# Altium PCB Paw_Back.PcbDoc
Units mm, origin at the board's own origin, x right, y up, seen from the top; angles counter-clockwise.
Board outline 50 x 50 mm, 2 copper layers (Top Layer, Bottom Layer); 42 components, 68 nets, 205 pads, 0 vias.
Unrouted connection lines stored in the file: 128.
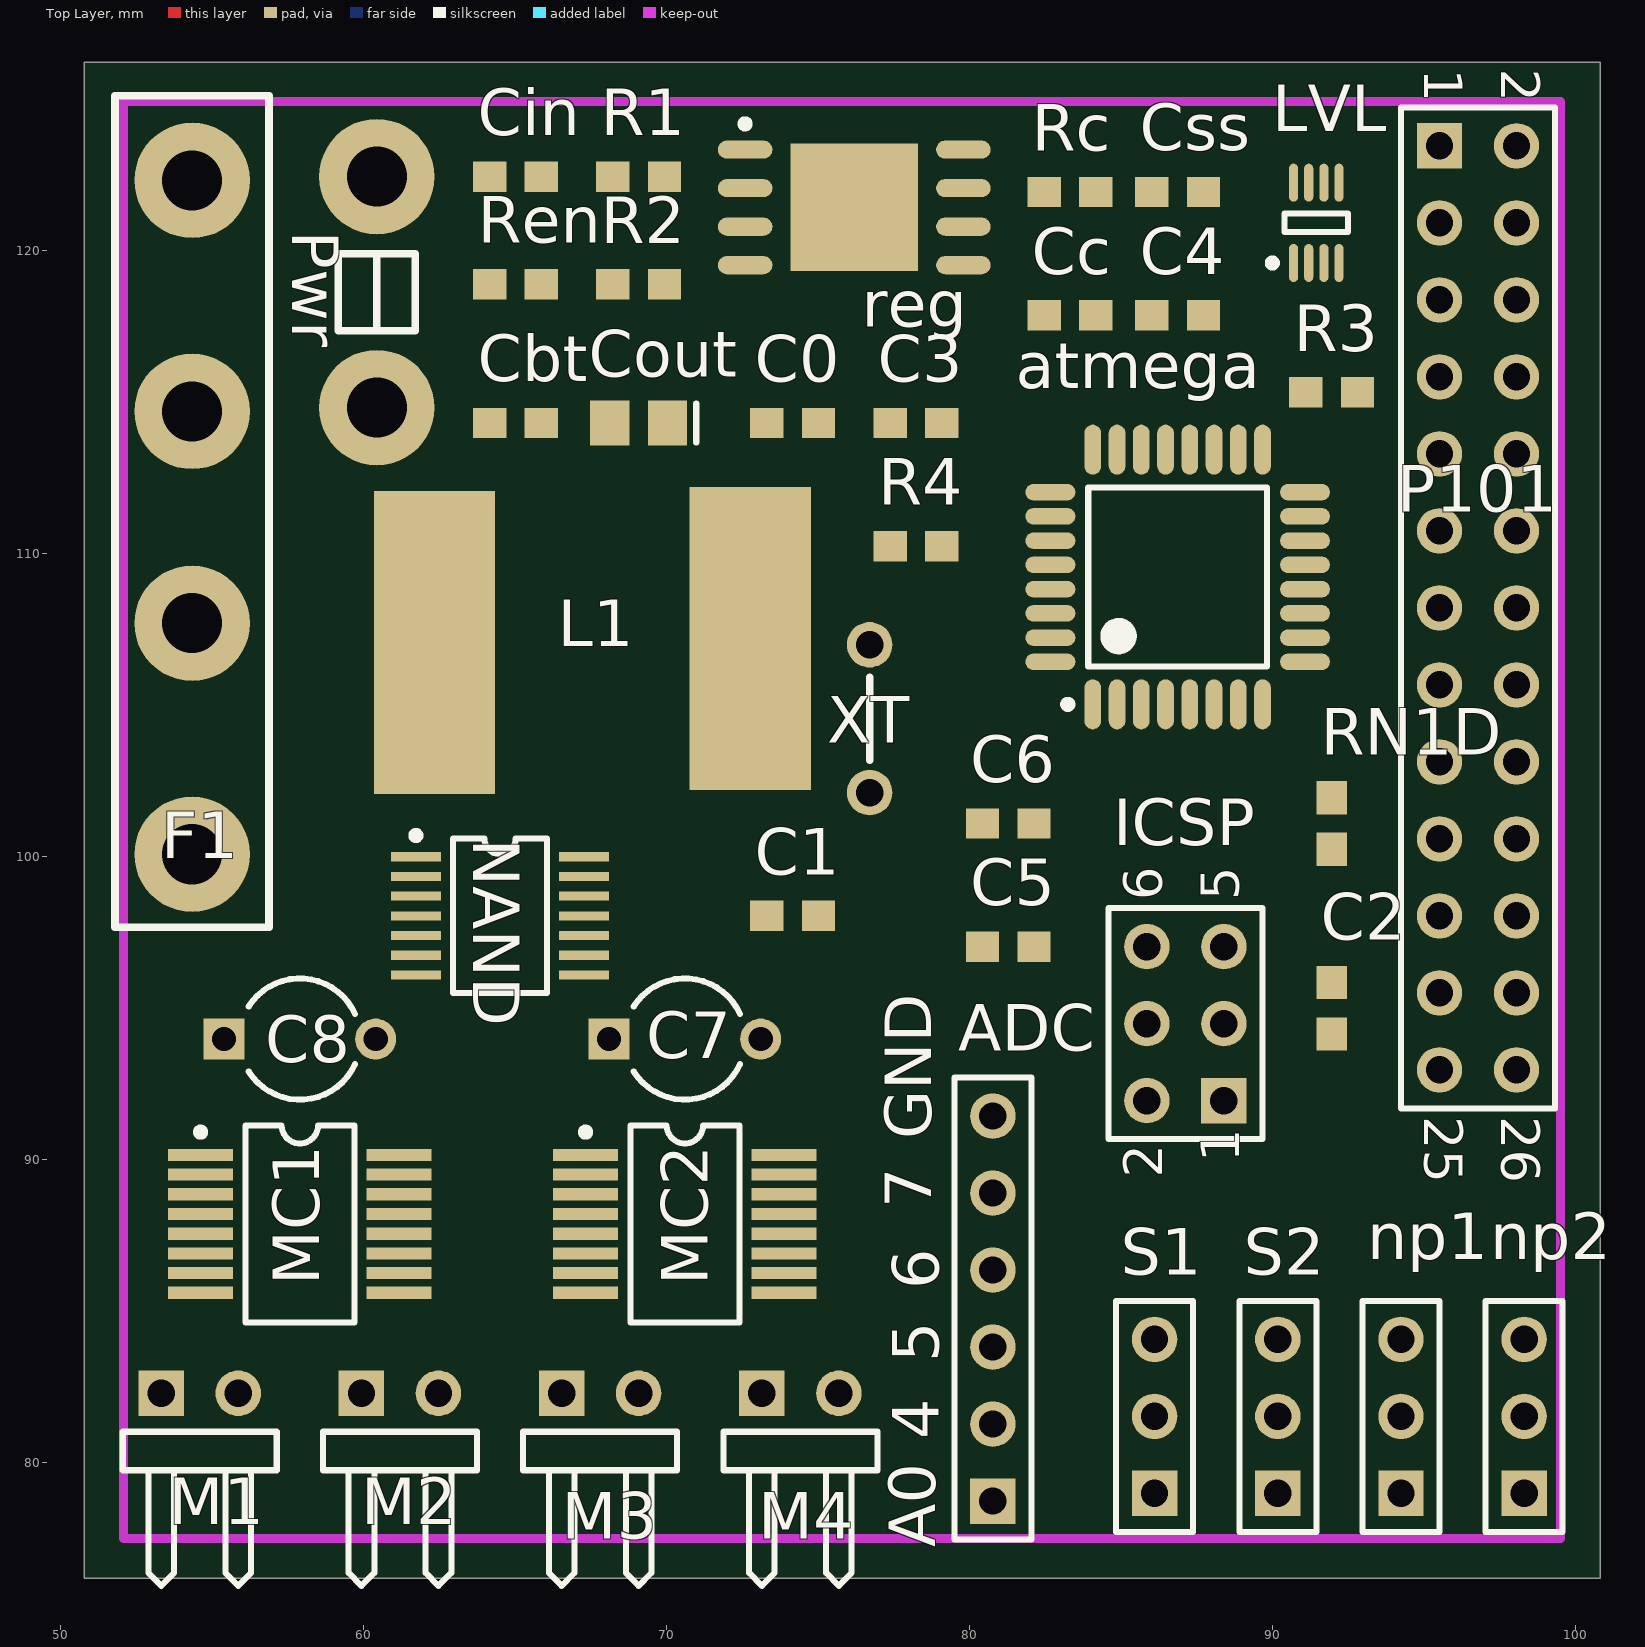
[diagram p0: Top Layer view]
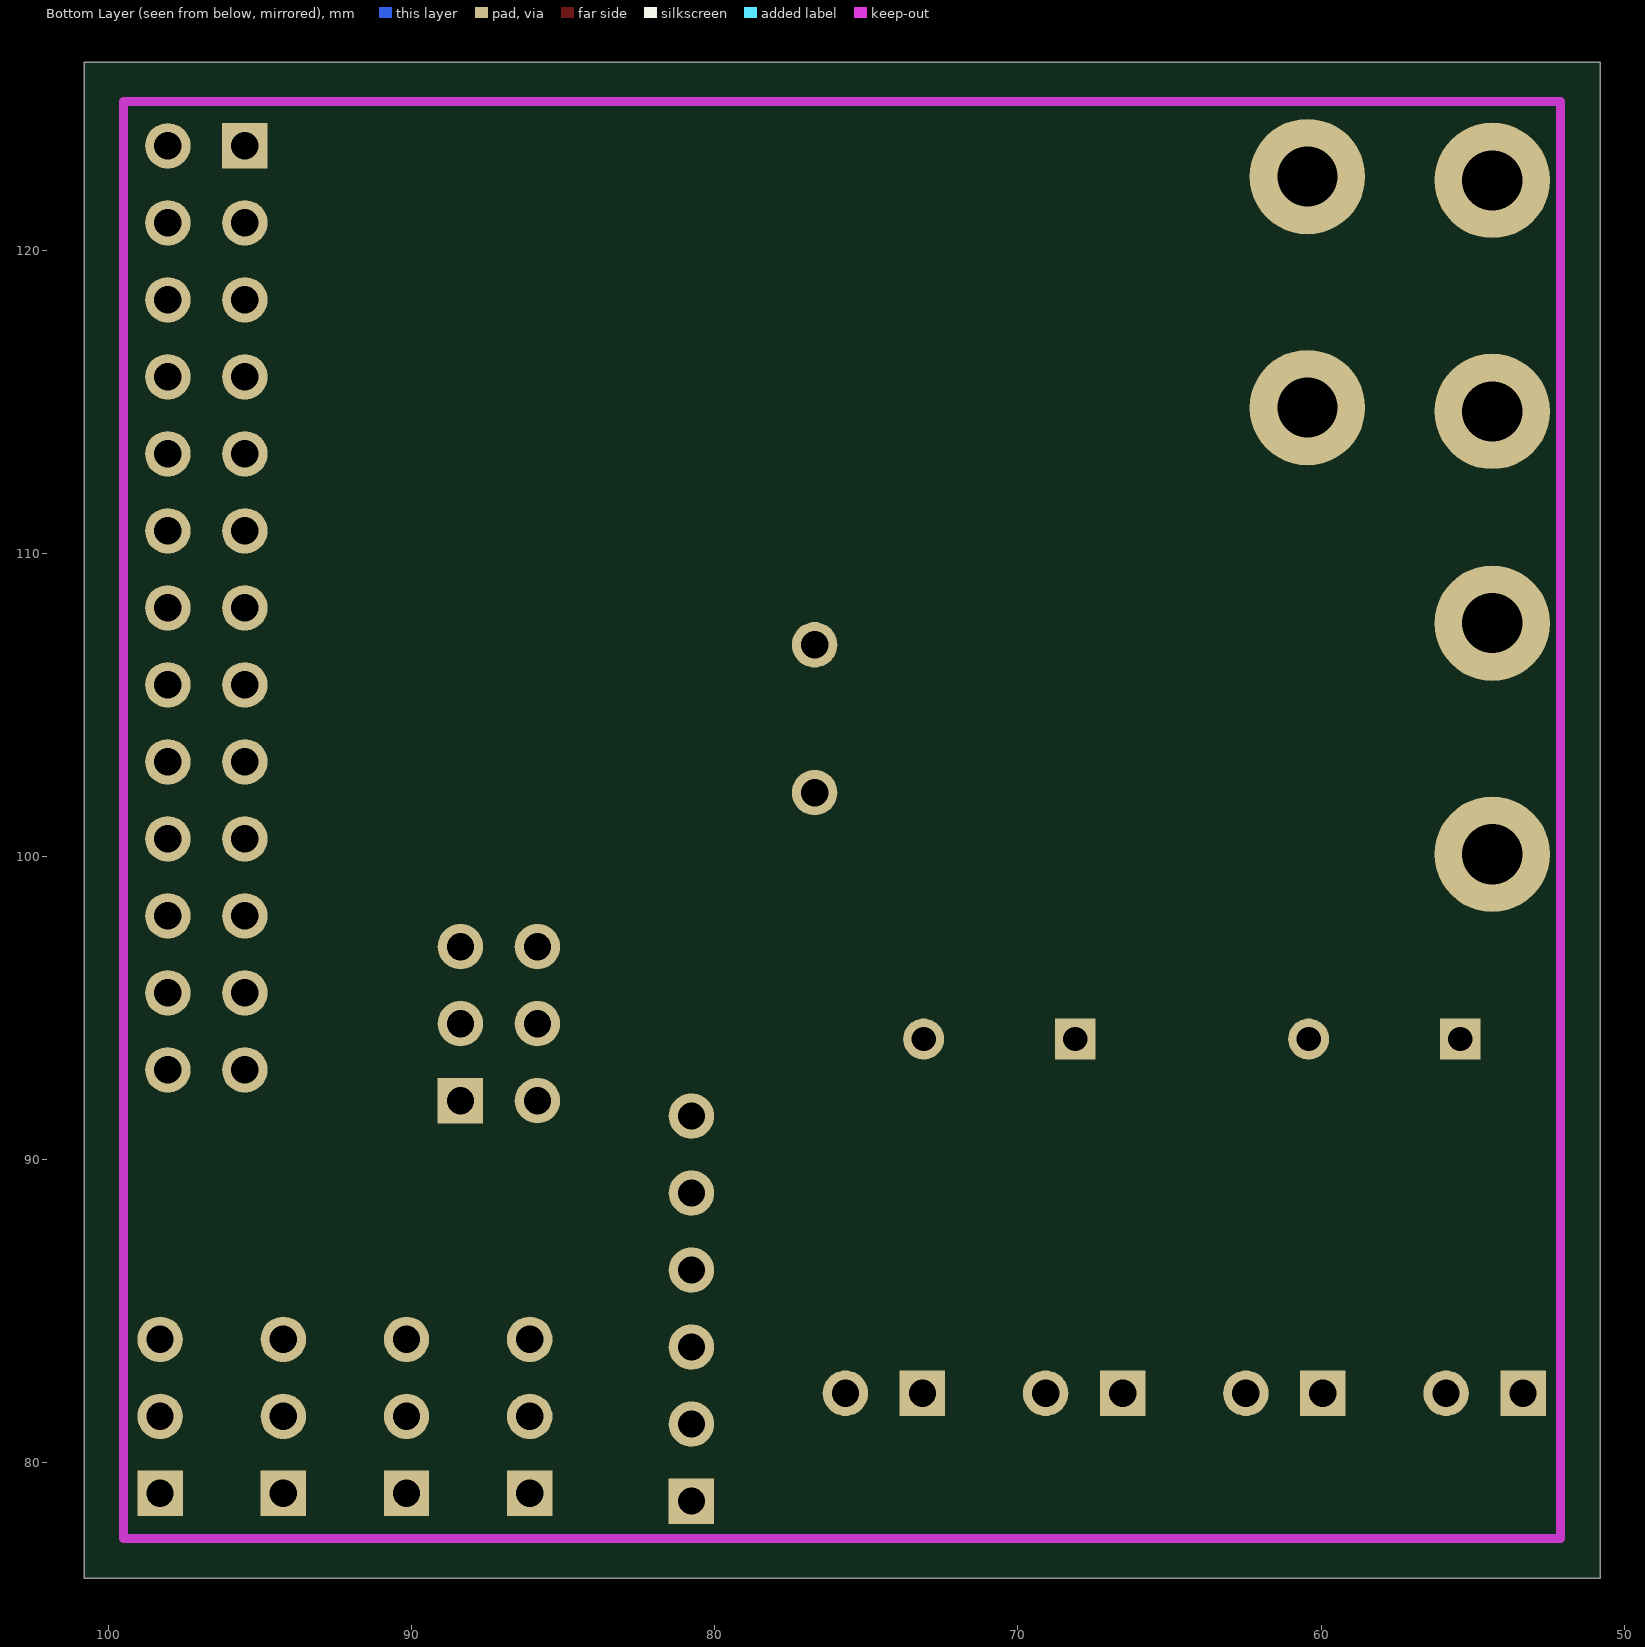
[diagram p1: Bottom Layer view, seen from below]

## Layer stack, top to bottom
Top Layer: signal copper 0.0356
Dielectric: dielectric 0.32, FR-4, Dk 4.8
Bottom Layer: signal copper 0.0356

## Board outline
50.8,76.2 100.8,76.2 100.8,126.2 50.8,126.2

## Design rules (kind name [scope] priority, off if disabled: settings)
Clearance [All] p1: gap=0.2
PolygonConnect [All] p1: connectstyle=Relief reliefconductorwidth=0.254 reliefentries=4 polygonreliefangle="90 Angle"
RoomDefinition U_PwrSupply [InComponentClass('U_PwrSupply')] p1: confinementstyle=ConfineIn formatcopy=TRUE lockcomponents=FALSE outline 0,0 50.8,0 50.8,25.4 0,25.4
RoomDefinition U_MotorDriverToshiba [InComponentClass('U_MotorDriverToshiba')] p2: confinementstyle=ConfineIn formatcopy=TRUE lockcomponents=FALSE outline 0,0 50.8,0 50.8,25.4 0,25.4
RoomDefinition RpiPaw1_Sch [InComponentClass('RpiPaw1_Sch')] p3: confinementstyle=ConfineIn formatcopy=TRUE lockcomponents=FALSE outline 0,0 50.8,0 50.8,25.4 0,25.4
RoutingVias [All] p1: holewidth=0.6 width=1 viastyle="Through Hole" minholewidth=0.711 minwidth=1.27 maxholewidth=0.711 maxwidth=1.27
SilkscreenOverComponentPads [All] p1: minsilkscreentomaskgap=0.254
SolderMaskExpansion [All] p1: expansion=0.102
TestPointUsage [All] p1: valid=0 allowmultiple=FALSE
Testpoint [All] p1: side=15 testpointundercomponent=TRUE minsize=1.016 maxsize=2.54 preferedsize=1.524 minholesize=0 maxholesize=1.016 preferedholesize=0.813 testpointgrid=0.025 style=1023 order=0123456789
Width Width_2 [InNetClass('12V')] p1: maxlimit=0.508 minlimit=0.254 preferedwidth=0.254 toplayer_prefwidth=0.381 bottomlayer_prefwidth=0.381 minimp=50.000000 maximp=50.000000 favimp=50.000000
Width Width_1 [InNetClass('All Nets')] p2: maxlimit=0.508 minlimit=0.254 preferedwidth=0.254 toplayer_prefwidth=0.305 bottomlayer_prefwidth=0.305 minimp=50.000000 maximp=50.000000 favimp=50.000000
Width [All] p3: maxlimit=0.2 minlimit=0.2 preferedwidth=0.2
23 further rules are at their usual default settings.

## Classes and differential pairs
net class 12V: VBATT
net class Motor: NetM1_1 NetM1_2 NetM2_1 NetM2_2 NetM3_1 NetM3_2 NetM4_1 NetM4_2
component class U_PwrSupply: 5VREG -2 Cbt Cc Cin Cout Css L1 R1 R2 Rc reg Ren
component class U_MotorDriverToshiba: C5 C6 C7 C8 M1 M2 M3 M4 MC1 MC2 NAND
component class RpiPaw1_Sch: ADC "Arduino Clone" atmega C0 C1 C2 C3 C4 F1 ICSP LVL np1 np2 P101 Pwr R3 R4 RN1D S1 S2 XT

## Components (designator, comment, footprint, x,y, rotation, side; value= is the part's Value field where it differs from the comment)
ADC "A0A4A5A6A7" HDR1X6 80.772,78.74 r90 top
atmega "ATmega328P-AUR" TQFP32_N 86.868,109.22 r90 top (schematic designator "Arduino Clone")
C0 "" J1-0603 74.168,114.3 r0 top
C1 "" J1-0603 74.168,98.044 r0 top
C2 "Cap" J1-0603 91.948,94.996 r270 top
C3 "Cap" J1-0603 78.232,114.3 r0 top
C4 "Cap" J1-0603 86.868,117.856 r0 top
C5 "" J1-0603 81.28,97.028 r0 top
C6 "" J1-0603 81.28,101.092 r0 top
C7 "" CAPR5-4X5 70.612,93.98 r0 top
C8 "" CAPR5-4X5 57.912,93.98 r0 top
Cbt "" J1-0603 65.024,114.3 r180 top (schematic designator Cboot)
Cc "" J1-0603 83.312,117.856 r0 top
Cin "" J1-0603 65.024,122.428 r180 top
Cout "" C0805 69.088,114.3 r180 top
Css "" J1-0603 86.868,121.92 r180 top
F1 "Fuse 1" FusePad 54.356,100.076 r90 top
ICSP "Header 3X2" HDR2X3 88.392,91.948 r90 top
L1 "" Inductor_Paw 67.564,107.188 r180 top
LVL "TXB0102" TSSOP50P310X90-8N 91.44,120.904 r90 top (schematic designator TXB01012)
M1 "Header 2H" HDR1X2H 53.34,82.296 r0 top
M2 "Header 2H" HDR1X2H 59.944,82.296 r0 top
M3 "Header 2H" HDR1X2H 66.548,82.296 r0 top
M4 "Header 2H" HDR1X2H 73.152,82.296 r0 top
MC1 "TB6552FNG" SSOP16 57.912,87.884 r270 top
MC2 "TB6552FNG" SSOP16 70.612,87.884 r270 top
NAND "MM74HC132MTC" TSSOP14 64.516,98.044 r270 top
np1 "neoPix1" HDR1X3 94.234,78.994 r90 top (schematic designator LED1)
np2 "neoPix2" HDR1X3 98.298,78.994 r90 top (schematic designator LED2)
P101 "Header 13X2" HDR2X13 95.504,123.444 r270 top
Pwr "Header 2" PwrPlug 60.452,114.808 r90 top
R1 "" J1-0603 69.088,122.428 r0 top
R2 "" J1-0603 69.088,118.872 r0 top
R3 "Res2" J1-0603 91.948,115.316 r0 top
R4 "Res2" J1-0603 78.232,110.236 r0 top
Rc "" J1-0603 83.312,121.92 r0 top
reg "RT8250GSP" SOP-8-C_N 76.2,121.412 r0 top (schematic designator 5VREG)
Ren "" J1-0603 65.024,118.872 r0 top
RN1D "Res2" J1-0603 91.948,101.092 r90 top
S1 "Servo1" HDR1X3 86.106,78.994 r90 top (schematic designator Servo1)
S2 "Servo2" HDR1X3 90.17,78.994 r90 top (schematic designator Servo2)
XT "XTAL" "Axial 0.2" 76.708,102.108 r90 top (schematic designator 16MHz)

## Footprints (in the part's own frame and the unit in brackets; to place one, negate y for a bottom-side part, rotate by r counter-clockwise, add the part's x,y. Pads: shape width x height; smd on the part's side, far side on the other; paste and mask are expansions set on the pad)
"Axial 0.2" [mm]
  round 1.5 hole 0.9: 1(0,0) 2(4.877,0)
  silkscreen extent 1.07,0 3.81,0
C0805 [mm] "Chip Capacitor; Body 2.0 x 1.2 mm (LxW typ)"
  rect 1.3x1.5 smd: 1(-0.95,0) 2(0.95,0)
  silkscreen extent -1.9,-0.65 -1.9,0.65
CAPR5-4X5 [mm] "Capacitor; 2 Leads"
  rect 1.35x1.35 hole 0.8: 1(-2.5,0)
  round 1.35 hole 0.8: 2(2.5,0)
  silkscreen extent -1.69,-2 1.82,2
FusePad [mil]
  round 150 hole 78: 1(0,0) 2(300,0) 3(575,0) 4(875,0)
  silkscreen extent -95,-100 985,100
HDR1X2H [mm] "Connector; Header; 2 Position; Right Angle"
  rect 1.5x1.5 hole 0.9: 1(0,0)
  round 1.5 hole 0.9: 2(2.54,0)
  silkscreen extent -1.27,-6.35 3.81,-1.27
HDR1X3 [mm] "Connector; Header; 3 Position"
  rect 1.5x1.5 hole 0.9: 1(0,0)
  round 1.5 hole 0.9: 2(2.54,0) 3(5.08,0)
  silkscreen extent -1.27,-1.27 6.35,1.27
HDR1X6 [mm] "Connector; Header; 6 Position"
  rect 1.5x1.5 hole 0.9: 1(0,0)
  round 1.5 hole 0.9: 2(2.54,0) 3(5.08,0) 4(7.62,0) 5(10.16,0) 6(12.7,0)
  silkscreen extent -1.27,-1.27 13.97,1.27
HDR2X3 [mm] "Connector; Header; 3x2 Position"
  rect 1.5x1.5 hole 0.9: 1(0,0)
  round 1.5 hole 0.9: 2(0,2.54) 3(2.54,0) 4(2.54,2.54) 5(5.08,0) 6(5.08,2.54)
  silkscreen extent -1.27,-1.27 6.35,3.81
HDR2X13 [mm] "Connector; Header; 13x2 Position"
  rect 1.5x1.5 hole 0.9: 1(0,0)
  round 1.5 hole 0.9: 2(0,2.54) 3(2.54,0) 4(2.54,2.54) 5(5.08,0) 6(5.08,2.54) 7(7.62,0) 8(7.62,2.54) 9(10.16,0) 10(10.16,2.54) 11(12.7,0) 12(12.7,2.54) 13(15.24,0) 14(15.24,2.54) 15(17.78,0) 16(17.78,2.54) 17(20.32,0) 18(20.32,2.54) 19(22.86,0) 20(22.86,2.54) 21(25.4,0) 22(25.4,2.54) 23(27.94,0) 24(27.94,2.54) 25(30.48,0) 26(30.48,2.54)
  silkscreen extent -1.27,-1.27 31.75,3.81
Inductor_Paw [mm]
  rect 4x10 smd: 1(-5.207,0) 2(5.207,0.127)
  body extent -4.77,-4.36 4.19,4.62, height 4
J1-0603 [mm] "Chip Resistor; Body 1.6 x 0.8 mm (LxW typ)"
  rect 1.1x1 smd: 1(-0.85,0) 2(0.85,0)
PwrPlug [mil]
  round 150 hole 78: 1(0,0) 2(300,0)
  silkscreen extent 100,-50 200,50
SOP-8-C_N [mm] "8-Pin Small Outline Package 1.27 mm Pitch, IPC Medium Density"
  oval 1.8x0.6 smd: 1(-3.6,1.905) 2(-3.6,0.635) 3(-3.6,-0.635) 4(-3.6,-1.905) 5(3.6,-1.905) 6(3.6,-0.635) 7(3.6,0.635) 8(3.6,1.905)
  rect 4.2x4.2 smd: 9(0,0)
  silkscreen extent -3.72,2.63 -3.47,2.88, body extent -2.11,-2.28 2.11,2.28, height 1.45
SSOP16 [mm] "SSOP; 16 Leads; Body Width 5.3 mm; Pitch 0.65 mm"
  rect 0.4x2.15 smd: 1(-2.275,-3.275) 2(-1.625,-3.275) 3(-0.975,-3.275) 4(-0.325,-3.275) 5(0.325,-3.275) 6(0.975,-3.275) 7(1.625,-3.275) 8(2.275,-3.275) 9(2.275,3.275) 10(1.625,3.275) 11(0.975,3.275) 12(0.325,3.275) 13(-0.325,3.275) 14(-0.975,3.275) 15(-1.625,3.275) 16(-2.275,3.275)
  silkscreen extent -3.25,-3.4 3.25,1.8
TQFP32_N [mm] "32-Pin Plastic Thin Quad Flat Pack (TFQP32), IPC Medium Density"
  oval 1.65x0.55 smd: 1(-4.2,2.8) 2(-4.2,2) 3(-4.2,1.2) 4(-4.2,0.4) 5(-4.2,-0.4) 6(-4.2,-1.2) 7(-4.2,-2) 8(-4.2,-2.8) 17(4.2,-2.8) 18(4.2,-2) 19(4.2,-1.2) 20(4.2,-0.4) 21(4.2,0.4) 22(4.2,1.2) 23(4.2,2) 24(4.2,2.8)
  oval 0.55x1.65 smd: 9(-2.8,-4.2) 10(-2,-4.2) 11(-1.2,-4.2) 12(-0.4,-4.2) 13(0.4,-4.2) 14(1.2,-4.2) 15(2,-4.2) 16(2.8,-4.2) 25(2.8,4.2) 26(2,4.2) 27(1.2,4.2) 28(0.4,4.2) 29(-0.4,4.2) 30(-1.2,4.2) 31(-2,4.2) 32(-2.8,4.2)
  silkscreen extent -4.32,-2.95 2.95,3.75, body extent -3.5,-3.5 3.5,3.5, height 1.2
TSSOP14 [mm] "Shrink Small Outline; 14 Leads; Body Width 4.4 mm; Pitch 0.65 mm"
  rect 0.3x1.65 smd: 1(-1.95,-2.775) 2(-1.3,-2.775) 3(-0.65,-2.775) 4(0,-2.775) 5(0.65,-2.775) 6(1.3,-2.775) 7(1.95,-2.775) 8(1.95,2.775) 9(1.3,2.775) 10(0.65,2.775) 11(0,2.775) 12(-0.65,2.775) 13(-1.3,2.775) 14(-1.95,2.775)
  silkscreen extent -2.77,-2.9 2.55,1.55
TSSOP50P310X90-8N [mm] "TSSOP, 8-Leads, Body 2.1x2.4mm (max), Pitch 0.50mm, IPC Medium Density"
  oval 1.25x0.3 smd: 1(-1.325,0.75) 2(-1.325,0.25) 3(-1.325,-0.25) 4(-1.325,-0.75) 5(1.325,-0.75) 6(1.325,-0.25) 7(1.325,0.25) 8(1.325,0.75)
  silkscreen extent -1.45,-1.05 0.3,1.57, body extent -1.2,-1.05 1.2,1.05, height 0.9

## Part data
ADC: library part "Header 6", "Header, 6-Pin"
atmega: "8-bit AVR Microcontroller, 32KB Flash, 1KB EEPROM, 2KB SRAM, 32-pin TQFP, Industrial Grade (-40°C to 85°C)"
C0 C1: library part Cap, "Capacitor"
C2 C3 C4: "Capacitor"
C5 C6 Cbt Cc Cin Cout Css: library part CAP, "Capacitor"
C7 C8: library part Cap2, "Capacitor"
F1: "Fuse"
ICSP: "Header, 3-Pin, Dual row"
L1: library part Inductor, "Inductor"
LVL: "3.3V Level translator"
M1 M2 M3 M4: "Header, 2-Pin, Right Angle"
MC1 MC2: "2CH 1A PMIC"
NAND: "4Ch NAND Gate"
np1 np2 S1 S2: library part "Header 3", "Header, 3-Pin"
P101: "Header, 13-Pin, Dual row"
Pwr: "Header, 2-Pin"
R1 R2 Rc Ren: library part Res3, "Resistor"
R3 R4 RN1D: "Resistor"
reg: "3A 5V Buck Regulator"
XT: "Crystal Oscillator"

## Nets (pads, with @x,y where several pads share a name; then routed paths per layer and width w, separated by ;. In a path a pad name is that pad's centre, name@x,y a point inside that pad or via, vN(x,y) a via of type N, cw(c..) or ccw(c..) an arc to the next point about the centre after c; other vN are vias at no path point)
+3.3V: LVL.3 P101.1
+5V: atmega.4 atmega.6 C2.2 C3.2 C5.2 C6.2 Cout.2 ICSP.2 L1.2 LVL.6 LVL.7 MC1.16 MC2.16 np1.2 np2.2 P101.2 R1.2 R3.2 RN1D.2 S1.2 S2.2
GND: ADC.6 atmega.3 atmega.5 atmega.21 C0.1 C1.1 C2.1 C3.1 C4.1 C5.1 C6.1 C7.2 C8.2 Cin.1 Cout.1 Css.1 ICSP.6 LVL.2 MC1.1 MC1.9 MC2.1 MC2.9 NAND.7 np1.3 np2.3 P101.6 Pwr.1 R2.1 Rc.1 reg.4 reg.9 S1.3 S2.3
GPIO0(SDA): P101.3
GPIO1(SCL): P101.5
GPIO4: P101.7
GPIO7(CE1): P101.26
GPIO8(CE0): P101.24
GPIO9(MISO): P101.21
GPIO10(MOSI): P101.19
GPIO17: P101.11
GPIO18: P101.12
GPIO21: P101.13
GPIO22: P101.15
GPIO23: P101.16
GPIO24: P101.18
GPIO25: P101.22
GPIO(SCLK): P101.23
MISO: atmega.16 ICSP.1
MOSI: atmega.15 ICSP.4 S2.1
Net5VREG_1: Cbt.2 reg.1
Net5VREG_3: Cbt.1 L1.1 reg.3
Net5VREG_5: R1.1 R2.2 reg.5
Net5VREG_6: Cc.1 reg.6
Net5VREG_7: reg.7 Ren.1
Net5VREG_8: Css.2 reg.8
Net16MHz_1: atmega.7 C0.2 R4.2 XT.1
Net16MHz_2: atmega.8 C1.2 R4.1 XT.2
NetADC_1: ADC.1 atmega.23
NetADC_2: ADC.2 atmega.27
NetADC_3: ADC.3 atmega.28
NetADC_4: ADC.4 atmega.19
NetADC_5: ADC.5 atmega.22
"NetArduino Clone_1": atmega.1 MC1.4
"NetArduino Clone_2": atmega.2 MC1.15 NAND.4 NAND.5
"NetArduino Clone_9": atmega.9 MC1.13
"NetArduino Clone_10": atmega.10 MC2.4
"NetArduino Clone_11": atmega.11 MC2.2 NAND.9 NAND.10
"NetArduino Clone_12": atmega.12 MC2.15 NAND.12 NAND.13
"NetArduino Clone_13": atmega.13 MC2.13
"NetArduino Clone_14": atmega.14 S1.1
"NetArduino Clone_18": atmega.18 R3.1
"NetArduino Clone_20": atmega.20 C4.2
"NetArduino Clone_24": atmega.24 np1.1
"NetArduino Clone_25": atmega.25 MC1.5 MC1.12 MC2.5 MC2.12
"NetArduino Clone_26": atmega.26 np2.1
"NetArduino Clone_30": atmega.30 LVL.8
"NetArduino Clone_31": atmega.31 LVL.1
"NetArduino Clone_32": atmega.32 MC1.2 NAND.1 NAND.2
NetCc_2: Cc.2 Rc.2
NetF1_1: F1.1 Pwr.2
NetM1_1: M1.1 MC1.7
NetM1_2: M1.2 MC1.8
NetM2_1: M2.1 MC1.11
NetM2_2: M2.2 MC1.10
NetM3_1: M3.1 MC2.7
NetM3_2: M3.2 MC2.8
NetM4_1: M4.1 MC2.11
NetM4_2: M4.2 MC2.10
NetMC1_3: MC1.3 NAND.3
NetMC1_14: MC1.14 NAND.6
NetMC2_3: MC2.3 NAND.8
NetMC2_14: MC2.14 NAND.11
RESET: atmega.29 ICSP.5 RN1D.1
RXD: LVL.5 P101.10
SCK: atmega.17 ICSP.3
TXD: LVL.4 P101.8
VBATT: C7.1 C8.1 Cin.2 F1.2 MC1.6 MC2.6 reg.2 Ren.2
pads on no net: F1.3 F1.4 NAND.14 P101.4 P101.9 P101.14 P101.17 P101.20 P101.25

## Keep-outs
Keep-Out Layer:
  lines w0.3: 52.1,77.5 52.1,124.9 99.5,124.9 99.5,77.5 52.1,77.5

## Silkscreen, mask and mechanical layers (free items; w line width, h text height)
Top Overlay:
  text "GND" at 78.74,90.678 h1.52 r90
  text "7" at 78.74,88.392 h1.52 r90
  text "6" at 78.994,85.725 h1.52 r90
  text "5" at 78.994,83.312 h1.52 r90
  text "4" at 78.994,80.772 h1.52 r90
  text "A0" at 78.867,77.216 h1.52 r90

## Dimensions
52.1,77.5 to 52.1,124.9 on Mechanical 1
52.1,77.5 to 99.5,77.5 on Mechanical 1

## Text inside footprints (layer, text, board x,y; h text height)
ICSP: Top Overlay "6" at 86.36,98.552 h1.27 r90; Top Overlay "5" at 88.9,98.552 h1.27 r90; Top Overlay "2" at 86.36,89.408 h1.27 r90; Top Overlay "1" at 88.9,89.916 h1.27 r90
P101: Top Overlay "2" at 97.536,125.984 h1.27 r270; Top Overlay "1" at 94.996,125.984 h1.27 r270; Top Overlay "25" at 94.996,91.44 h1.27 r270; Top Overlay "26" at 97.536,91.44 h1.27 r270